# EAGLE board power electronics6 (EAGLE 9.2.2)
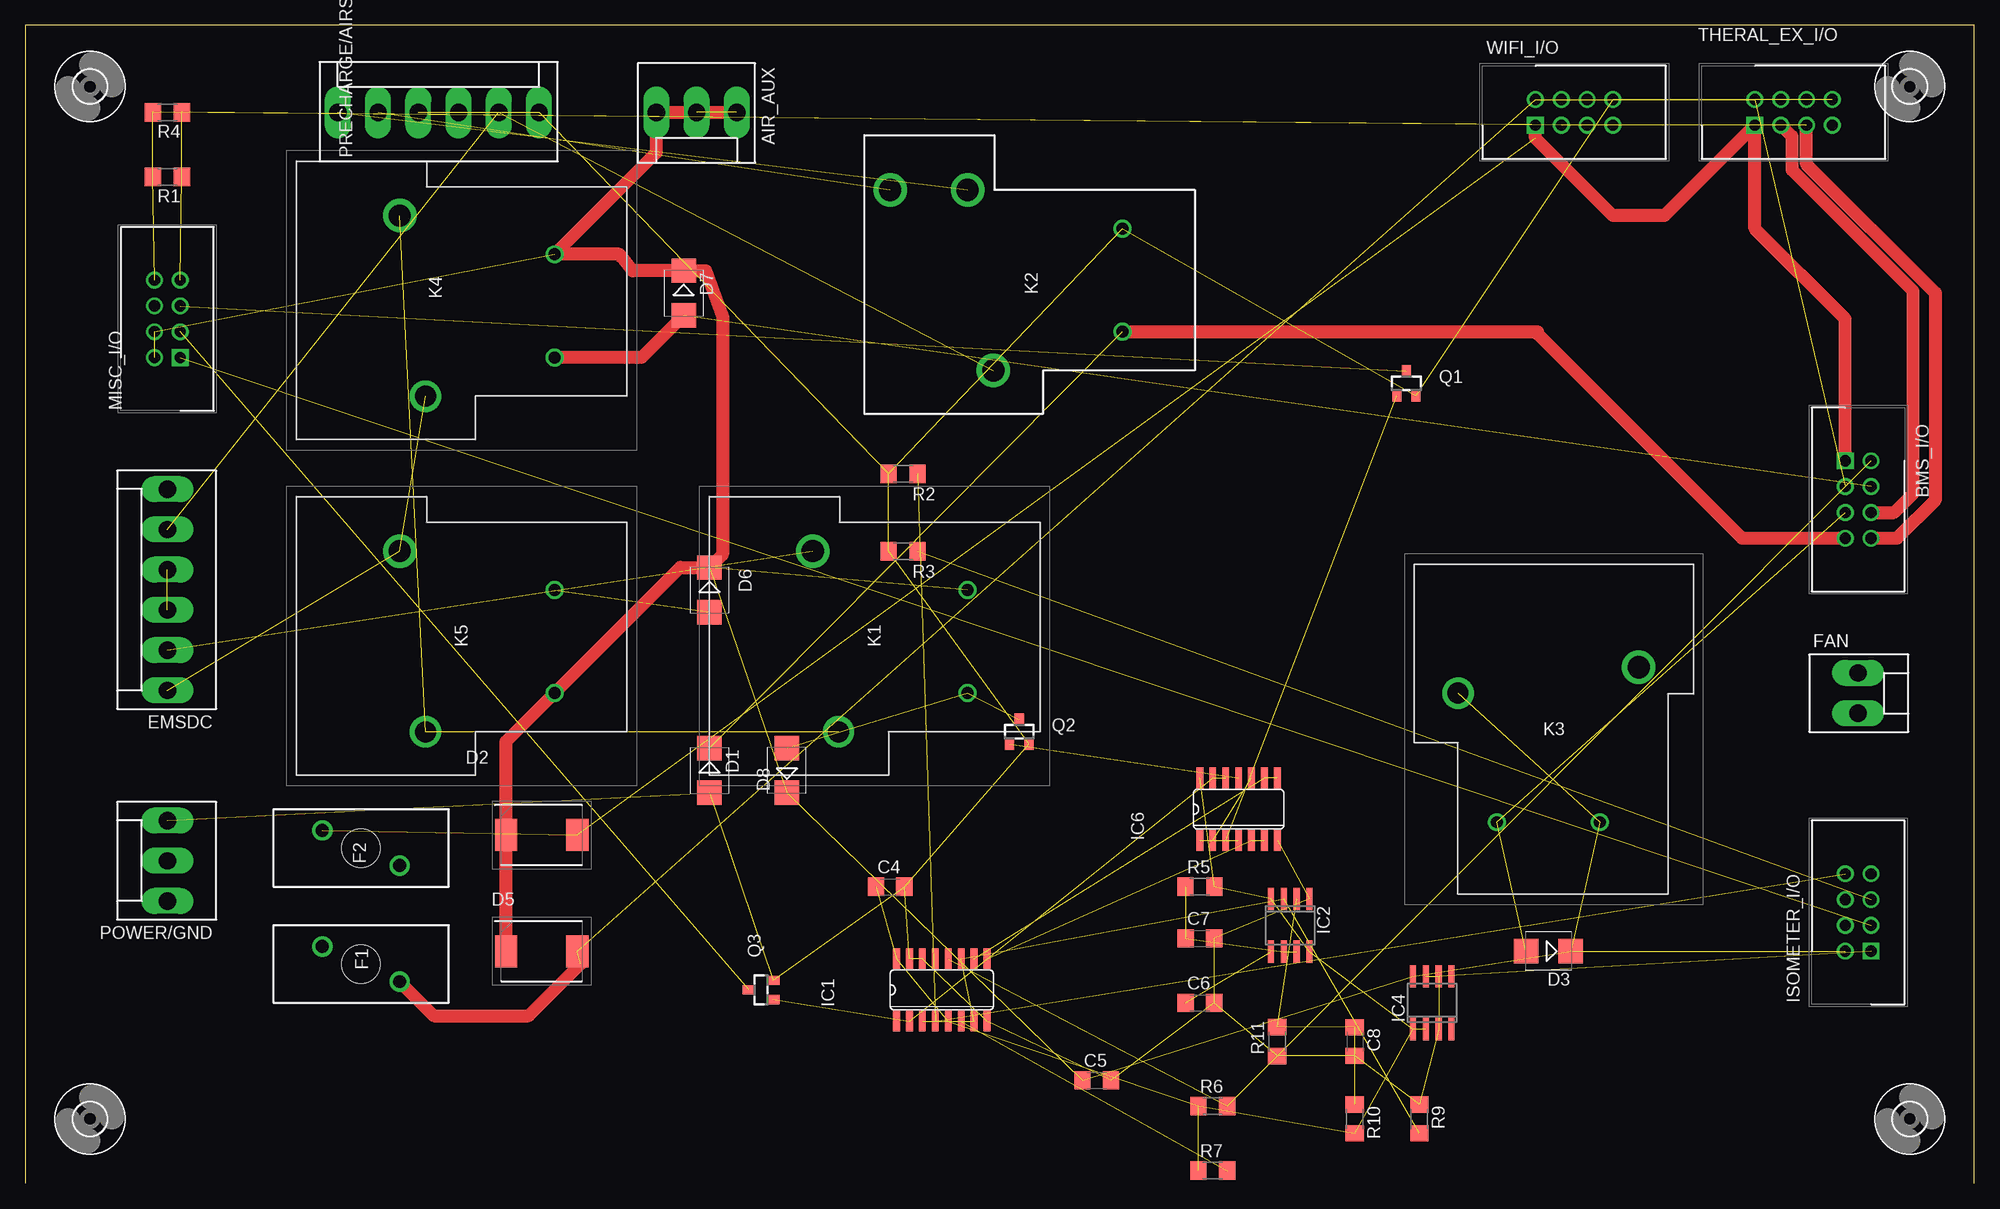
[diagram p0: board, top side]
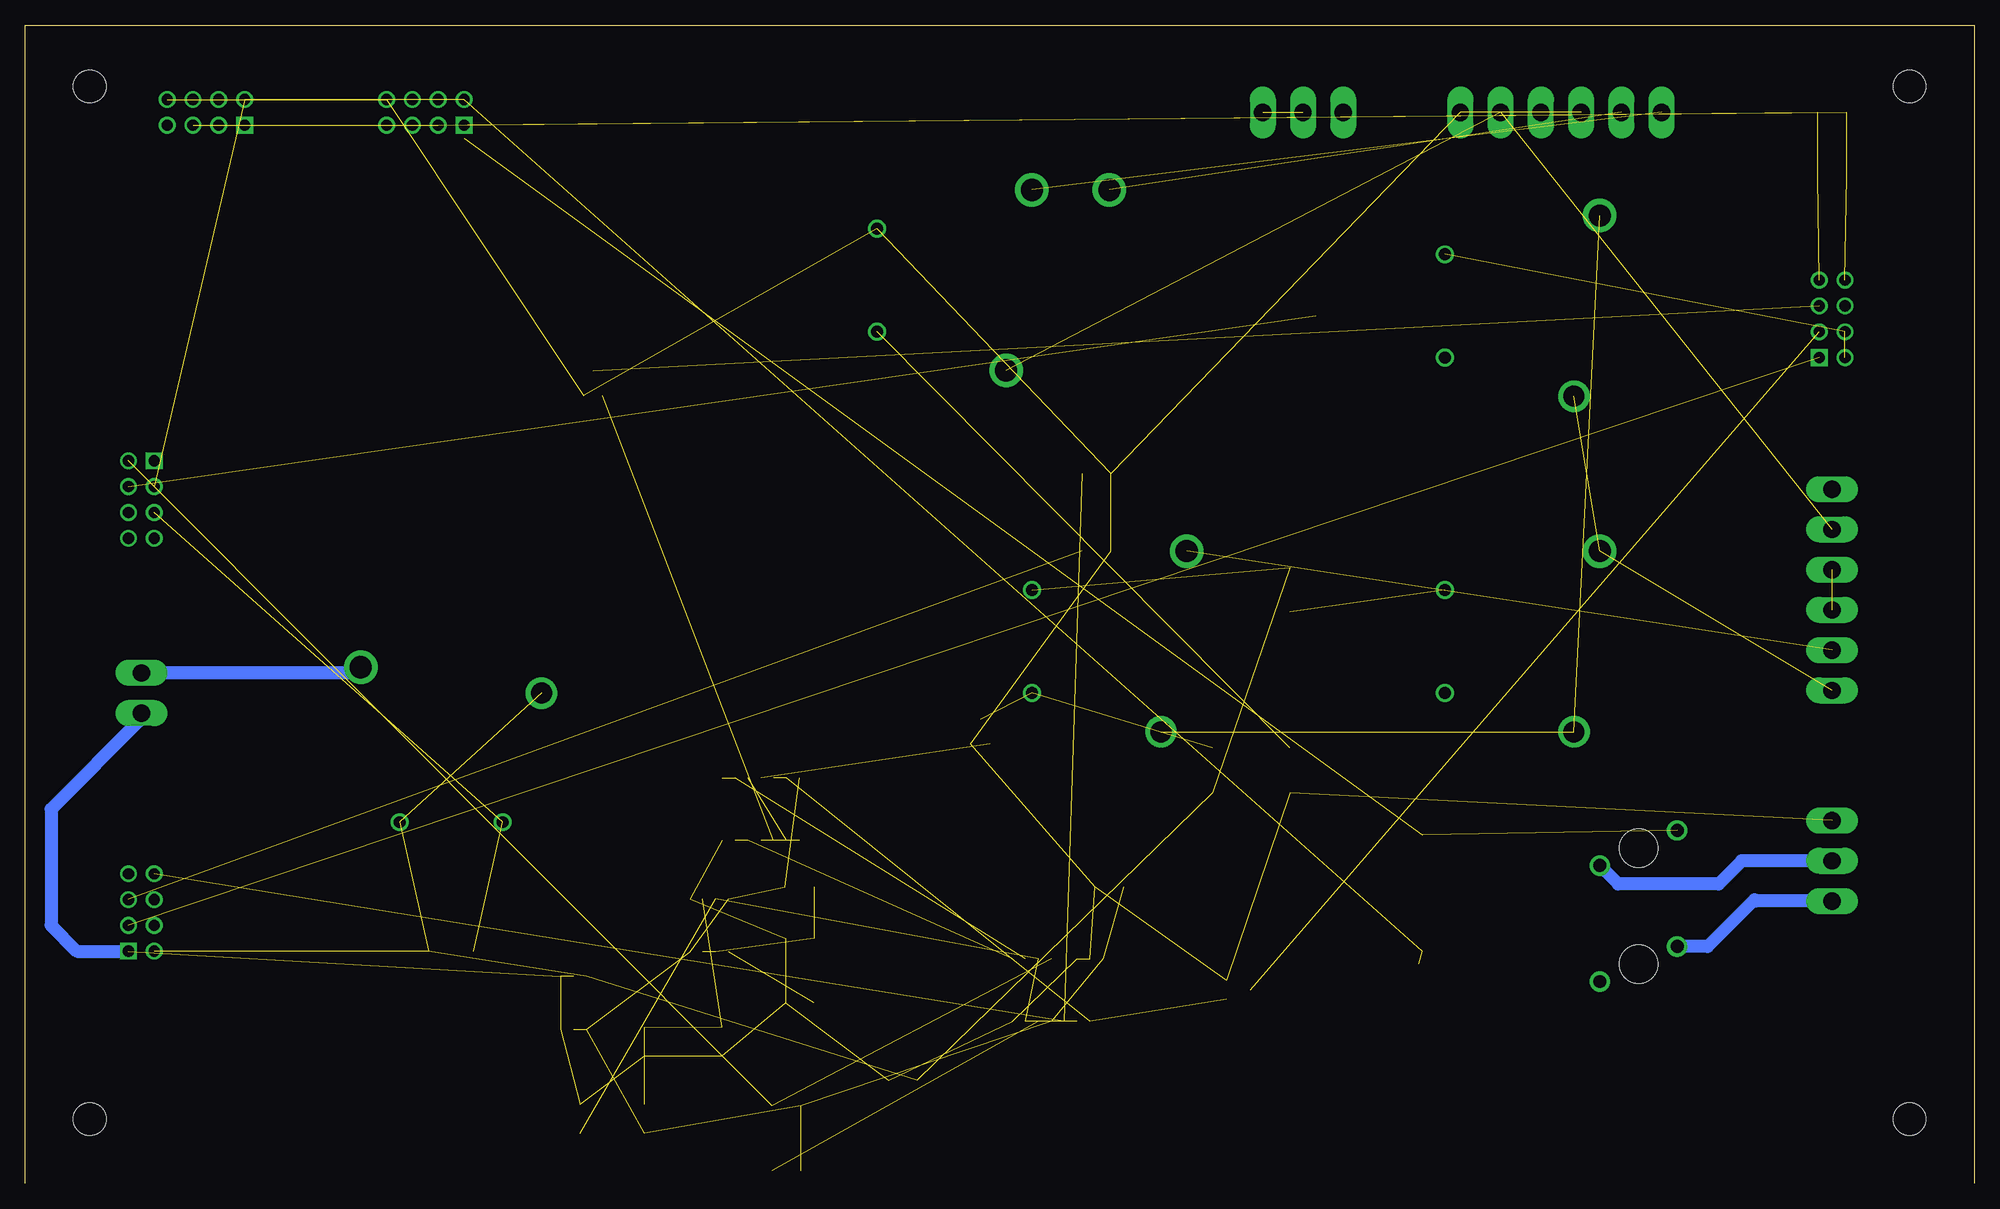
[diagram p1: board, bottom side, seen from below]

Size 191.75 x 113.97 mm. Coordinates in mm from the lower left corner, seen from the top.
Outline: 191.75,0 191.75,113.97 0,113.97 0,0
Copper layers (1*16): Top 0.035mm / dielectric 1.5mm / Bottom 0.035mm
Design rules "default": minimum track width 6mil, minimum drill 0.35mm, track to track 6mil, track to pad 6mil, pad to pad 6mil, via to via 6mil, smd to smd 6mil, copper to edge 40mil, drill to drill 6mil, minimum pad ring 10mil, minimum via ring 8mil, stop-mask expansion 4mil, vias tented up to drill 0mil, thermal gap 10mil

## Footprints (pad centres in the part's own frame; a part is rotated, then mirrored left to right if it is on the bottom)
KK-156-3 = drill 1.7 pad 2.184 long: 1 -3.96,0; 2 0,0; 3 3.96,0
HDRV8W64P254_2X4_1778X895X915P = drill 1.1 pad 1.65 square: 1 0,0 | drill 1.1 pad 1.65: 2 0,2.54; 3 2.54,0; 4 2.54,2.54; 5 5.08,0; 6 5.08,2.54; 7 7.62,0; 8 7.62,2.54
C1206 = smd 1.6 x 1.8: 1 -1.4,0; 2 1.4,0
SMB = smd 2.4 x 2.4: A 2.2,0; C -2.2,0
DIOM7959X262N = smd 2.2 x 3.15: 1 -3.5,0; 2 3.5,0
KK-156-6 = drill 1.7 pad 2.184 long: 1 -9.9,0; 2 -5.94,0; 3 -1.98,0; 4 1.98,0; 5 5.94,0; 6 9.9,0
01530008 = drill 1.27 pad 2: 1 1.727,3.81; 2 -1.727,-3.81 | hole 3.785: 0,0
KK-156-2 = drill 1.7 pad 2.184 long: 1 -1.98,0; 2 1.98,0
3,2 = hole 3.2: 0,0
SO16 = smd 0.66 x 2.032: 1 -4.445,-3.073; 2 -3.175,-3.073; 3 -1.905,-3.073; 4 -0.635,-3.073; 5 0.635,-3.073; 6 1.905,-3.073; 7 3.175,-3.073; 8 4.445,-3.073; 9 4.445,3.073; 10 3.175,3.073; 11 1.905,3.073; 12 0.635,3.073; 13 -0.635,3.073; 14 -1.905,3.073; 15 -3.175,3.073; 16 -4.445,3.073
SO08 = smd 0.6 x 2.2: 1 -1.905,-2.6; 2 -0.635,-2.6; 3 0.635,-2.6; 4 1.905,-2.6; 5 1.905,2.6; 6 0.635,2.6; 7 -0.635,2.6; 8 -1.905,2.6
SOIC8 = smd 0.6 x 2.2: 1 -1.905,-2.6; 2 -0.635,-2.6; 3 0.635,-2.6; 4 1.905,-2.6; 5 1.905,2.6; 6 0.635,2.6; 7 -0.635,2.6; 8 -1.905,2.6
SO14 = smd 0.66 x 2.032: 1 -3.81,-3.073; 2 -2.54,-3.073; 3 -1.27,-3.073; 4 0,-3.073; 5 1.27,-3.073; 6 2.54,-3.073; 7 3.81,-3.073; 8 3.81,3.073; 9 2.54,3.073; 10 1.27,3.073; 11 0,3.073; 12 -1.27,3.073; 13 -2.54,3.073; 14 -3.81,3.073
T9AS1D1248T9A = drill 1.17 pad 1.755: 1 0,0; 2 -10.16,0 | drill 2.06 pad 3.09: 3 -13.97,12.7 | drill 2.19 pad 3.3: 4 3.81,15.24
T9AS1D12 = drill 2.19 pad 3.29: 1 -8.89,12.7; 2 8.89,15.24; 3 8.89,22.86 | drill 1.17 pad 1.77: 4 -5.08,0; 5 5.08,0
SOT23 = smd 0.9 x 1.2: 1 -0.95,-1.2; 2 0.95,-1.2; 3 0,1.2
R1206 = smd 1.6 x 1.803: 1 -1.422,0; 2 1.422,0

## Placement (x,y rotation side)
AIR_AUX  [KK-156-3]  66.04,105.41 180 top
BMS_I/O  T821108A1S100CEU  [HDRV8W64P254_2X4_1778X895X915P]  179.07,71.12 270 top
C4  3.3uF  [C1206]  85.09,29.21 0 top
C5  1uF  [C1206]  105.41,10.16 0 top
C6  0.1uF  [C1206]  115.57,17.78 0 top
C7  220uF  [C1206]  115.57,24.13 0 top
C8  50uF  [C1206]  130.81,13.97 270 top
D1  ES2D  [SMB]  67.31,40.64 270 top
D2  VS-30BQ100-M3_9AT  [DIOM7959X262N]  50.8,34.29 0 top
D3  ES2D  [SMB]  149.86,22.86 180 top
D5  VS-30BQ100-M3_9AT  [DIOM7959X262N]  50.8,22.86 0 top
D6  ES2D  [SMB]  67.31,58.42 270 top
D7  ES2D  [SMB]  64.77,87.63 270 top
D8  ES2D  [SMB]  74.93,40.64 90 top
EMSDC  [KK-156-6]  13.97,58.42 90 top
F1  01530008Z  [01530008]  33.02,21.59 270 top
F2  01530008Z  [01530008]  33.02,33.02 90 top
FAN  [KK-156-2]  180.34,48.26 270 top
H1  MOUNT-HOLE3.2  [3,2]  185.42,6.35 0 top
H2  MOUNT-HOLE3.2  [3,2]  185.42,107.95 0 top
H3  MOUNT-HOLE3.2  [3,2]  6.35,6.35 0 top
H4  MOUNT-HOLE3.2  [3,2]  6.35,107.95 0 top
IC1  4043D  [SO16]  90.17,19.05 0 top
IC2  SE555D  [SO08]  124.46,25.4 180 top
IC4  [SOIC8]  138.43,17.78 0 top
IC6  4011D  [SO14]  119.38,36.83 0 top
ISOMETER_I/O  T821108A1S100CEU  [HDRV8W64P254_2X4_1778X895X915P]  181.61,22.86 90 top
K1  T9AS1D12-48=T9A  [T9AS1D1248T9A]  92.71,58.42 90 top
K2  T9AS5D12-12=T9A  [T9AS1D12]  107.95,88.9 90 top
K3  T9AS1D12-48=T9A  [T9AS1D1248T9A]  154.94,35.56 0 top
K4  T9AS1D12-48=T9A  [T9AS1D1248T9A]  52.07,91.44 90 top
K5  T9AS1D12-48=T9A  [T9AS1D1248T9A]  52.07,58.42 90 top
MISC_I/O  T821108A1S100CEU  [HDRV8W64P254_2X4_1778X895X915P]  15.24,81.28 90 top
POWER/GND  [KK-156-3]  13.97,31.75 90 top
PRECHARGE/AIRS  [KK-156-6]  40.64,105.41 0 top
Q1  BSS138  [SOT23]  135.89,78.74 0 top
Q2  BSS138  [SOT23]  97.79,44.45 0 top
Q3  BSS138  [SOT23]  72.39,19.05 90 top
R1  120  [R1206]  13.97,99.06 180 top
R2  2.2K  [R1206]  86.36,69.85 180 top
R3  2.2K  [R1206]  86.36,62.23 180 top
R4  120  [R1206]  13.97,105.41 180 top
R5  10K  [R1206]  115.57,29.21 0 top
R6  2.2K  [R1206]  116.84,7.62 0 top
R7  2.2K  [R1206]  116.84,1.27 0 top
R9  10K  [R1206]  137.16,6.35 270 top
R10  50K  [R1206]  130.81,6.35 270 top
R11  500K  [R1206]  123.19,13.97 90 top
THERAL_EX_I/O  T821108A1S100CEU  [HDRV8W64P254_2X4_1778X895X915P]  170.18,104.14 0 top
WIFI_I/O  T821108A1S100CEU  [HDRV8W64P254_2X4_1778X895X915P]  148.59,104.14 0 top

## Library data of the parts
AIR_AUX EMSDC FAN POWER/GND PRECHARGE/AIRS = con-molex; MF: MOLEX; OC_FARNELL: unknown; OC_NEWARK: unknown
BMS_I/O ISOMETER_I/O MISC_I/O THERAL_EX_I/O WIFI_I/O = SamacSys_Parts; DESCRIPTION: HEADER, VERTICAL, 2.54MM, 8WAY Amphenol T821 Series, 2.54mm Pitch 8 Way 2 Row Straight PCB Header, Solder Termination, 3A; HEIGHT: 9.15mm; MANUFACTURER_NAME: Amphenol; MANUFACTURER_PART_NUMBER: T821108A1S100CEU; RS_PART_NUMBER: 8323569; RS_PRICE-STOCK: http://uk.rs-online.com/web/p/products/8323569
C4-C8 = rcl; SPICEPREFIX: C
D1 D3 D6-D8 = diode
D2 D5 = SamacSys_Parts; DESCRIPTION: Vishay VS-30BQ100-M3/9AT SMT Schottky Diode, 100V 3A, 2-Pin DO-214AB; HEIGHT: 2.62mm; MANUFACTURER_NAME: Vishay; MANUFACTURER_PART_NUMBER: VS-30BQ100-M3/9AT; MOUSER_PART_NUMBER: 78-VS-30BQ100-M39AT; MOUSER_PRICE-STOCK: https://www.mouser.com/Search/Refine.aspx?Keyword=78-VS-30BQ100-M39AT
F1 F2 = SamacSys_Parts; ALLIED_NUMBER: 70184304; DESCRIPTION: Mini fuseholder,15A 32V Littelfuse 15A PCB Mount Fuse Holder Automotive Fuse, 32 V; HEIGHT: mm; MANUFACTURER_NAME: LITTELFUSE; MANUFACTURER_PART_NUMBER: 01530008Z; RS_PART_NUMBER: 3607317; RS_PRICE-STOCK: https://uk.rs-online.com/web/p/products/3607317
H1-H4 = holes
IC1 IC6 = 40xx
IC2 = linear
IC4 = linear-technology; MPN: LT1129CS8-5#PBF; OC_FARNELL: 1273576; OC_NEWARK: 57M2078
K1 K3-K5 = SamacSys_Parts; DESCRIPTION: SPST-NO PCB Mount Non-Latching Relay Through Hole, 48V dc; HEIGHT: 20.4mm; MANUFACTURER_NAME: TE Connectivity; MANUFACTURER_PART_NUMBER: T9AS1D12-48=T9A; RS_PART_NUMBER: 6802534P; RS_PRICE-STOCK: http://uk.rs-online.com/web/p/products/6802534P
K2 = SamacSys_Parts; ALLIED_NUMBER: R1111589; DESCRIPTION: PCB Relay SPDT 30A 12Vdc,thru hole SPDT PCB Mount Non-Latching Relay Through Hole, 12V dc; HEIGHT: mm; MANUFACTURER_NAME: TE Connectivity; MANUFACTURER_PART_NUMBER: T9AS5D12-12=T9A; RS_PART_NUMBER: 6802528; RS_PRICE-STOCK: https://uk.rs-online.com/web/p/products/6802528
Q1-Q3 = m-pad-2.1
R1-R7 R9-R11 = rcl; SPICEPREFIX: R

## Nets
+3V3: C4.1 IC1.5 IC1.16 IC2.4 IC2.8 IC4.1 IC4.2 IC6.14 R5.2 R6.1 R7.1 R10.2
+12V: AIR_AUX.1 AIR_AUX.2 AIR_AUX.3 C5.1 D2.1 D3.C D5.1 D6.C D7.C D8.C IC4.8 ISOMETER_I/O.2 K1.1 K3.1 K3.3 K4.1 K5.2 MISC_I/O.2 MISC_I/O.4
AMS_COIL_OUT: D8.A K1.2 Q2.3
AMS_LED-: MISC_I/O.5 Q1.3
CAN2_H: BMS_I/O.6 MISC_I/O.7 R1.1 R4.1 THERAL_EX_I/O.3 WIFI_I/O.3
CAN2_L: BMS_I/O.8 MISC_I/O.8 R1.2 R4.2 THERAL_EX_I/O.5 WIFI_I/O.5
CHARGE_POWER: BMS_I/O.3 D5.2 F1.1 THERAL_EX_I/O.2 WIFI_I/O.2
CHARGE_SAFE: D6.A K5.1
CHASSIS_GND: ISOMETER_I/O.3 MISC_I/O.1
CHG_SAFE: BMS_I/O.2 IC1.12 R6.2
DISCHARE_ENABLE: IC1.6 R7.2
DISCHARGE_ENABLE: BMS_I/O.4 D7.A K4.2
EMSDC_IMD+: K1.3 K4.4 K5.3
FAN+: FAN.1 K3.4
FAN_ENABLE: BMS_I/O.5 D3.A K3.2
GND: C4.2 C5.2 C6.2 C7.2 C8.2 D1.A FAN.2 IC1.8 IC1.14 IC1.15 IC2.1 IC4.3 IC4.6 IC4.7 IC6.7 ISOMETER_I/O.1 K2.5 POWER/GND.3 PRECHARGE/AIRS.3 PRECHARGE/AIRS.4 PRECHARGE/AIRS.6 Q1.2 Q2.2 Q3.2 R2.2 R3.2 R9.1 R11.1 THERAL_EX_I/O.8 WIFI_I/O.8
HIGHEST_TEMP: THERAL_EX_I/O.4
IMD_LED-: MISC_I/O.3 Q3.3
LOWEST_TEMP: THERAL_EX_I/O.6
M_HS: ISOMETER_I/O.5 R3.1
N$1: EMSDC.1 K4.3 K5.4
N$2: F2.2 POWER/GND.2
N$3: K2.2 PRECHARGE/AIRS.1
N$4: F1.2 POWER/GND.1
N$8: IC1.2 IC6.12 IC6.13 Q3.1
N$10: IC1.9 IC6.5 IC6.6
N$11: EMSDC.5 K2.1 PRECHARGE/AIRS.5
N$12: K2.3 PRECHARGE/AIRS.2
N$13: IC1.10 IC6.8 IC6.9
N$14: IC6.1 IC6.4
N$15: EMSDC.2 K1.4
N$17: C7.1 IC2.6 IC2.7 R5.1
N$19: EMSDC.3 EMSDC.4
N$20: IC6.2 IC6.10
N$21: IC6.3 Q1.1
N$28: C8.1 IC2.2 R10.1 R11.2
N$32: C6.1 IC2.5
N$37: IC6.11 Q2.1
OK_HS: IC1.4 ISOMETER_I/O.8 R2.1
PRECHARGE_SELECT: BMS_I/O.7 D1.C K2.4
READY_POWER: BMS_I/O.1 D2.2 F2.1 THERAL_EX_I/O.1 WIFI_I/O.1
STARTUP_RESET: IC1.3 IC1.7 IC1.11 IC2.3 R9.2

## Tracks (layer width: path | path; a pad name or v marks a point on that pad's centre or on a via)
+3V3  (11 unrouted)
+12V  (11 unrouted)
  Top 1.27: D5.1 D2.1 47.3,43.49 K5.2 64.43,60.62 D6.C 68.58,61.89 68.58,85.43 66.97,89.83 D7.C 59.77,89.83 58.65,91.21 58.42,91.44 K4.1 62.08,101.45 AIR_AUX.3 AIR_AUX.1
AMS_COIL_OUT  (2 unrouted)
AMS_LED-  (1 unrouted)
CAN2_H  (4 unrouted)
  Top 1.27: THERAL_EX_I/O.3 173.84,103.02 173.84,99.74 185.76,87.82 185.76,67.91 183.89,66.04 BMS_I/O.6
CAN2_L  (4 unrouted)
  Top 1.27: BMS_I/O.8 184.15,63.5 187.96,67.31 187.96,87.63 175.26,100.33 THERAL_EX_I/O.5
CHARGE_POWER  (4 unrouted)
  Top 1.27: F1.1 40.18,16.51 49.53,16.51 54.61,21.59
CHARGE_SAFE  (1 unrouted)
CHASSIS_GND  (1 unrouted)
CHG_SAFE  (2 unrouted)
DISCHARE_ENABLE  (1 unrouted)
DISCHARGE_ENABLE  (1 unrouted)
  Top 1.27: D7.A 60.62,81.28 K4.2
EMSDC_IMD+  (2 unrouted)
FAN+
  Bottom 1.27: K3.4 159.31,50.24 FAN.1
FAN_ENABLE  (2 unrouted)
GND  (28 unrouted)
  Bottom 1.27: FAN.2 180.34,45.72 189.23,36.83 189.23,25.4 186.69,22.86 ISOMETER_I/O.1
IMD_LED-  (1 unrouted)
M_HS  (1 unrouted)
N$1  (2 unrouted)
N$2
  Bottom 1.27: POWER/GND.2 22.86,31.75 25.13,29.48 35.01,29.48 F2.2
N$3  (1 unrouted)
N$4
  Bottom 1.27: POWER/GND.1 21.44,27.79 21.59,27.94 26.21,23.32 F1.2
N$8  (3 unrouted)
N$10  (2 unrouted)
N$11  (2 unrouted)
N$12  (1 unrouted)
N$13  (2 unrouted)
N$14  (1 unrouted)
N$15  (1 unrouted)
N$17  (3 unrouted)
N$19  (1 unrouted)
N$20  (1 unrouted)
N$21  (1 unrouted)
N$28  (3 unrouted)
N$32  (1 unrouted)
N$37  (1 unrouted)
OK_HS  (2 unrouted)
PRECHARGE_SELECT  (1 unrouted)
  Top 1.27: K2.4 148.81,83.82 148.84,83.57 168.91,63.5 BMS_I/O.7
READY_POWER  (2 unrouted)
  Top 1.27: BMS_I/O.1 179.07,85.09 170.18,93.98 THERAL_EX_I/O.1 161.29,95.25 156.21,95.25 148.59,102.87 WIFI_I/O.1
STARTUP_RESET  (4 unrouted)